# Altium PCB ESP32_USB_Dongle-PCB.PcbDoc
Units mm, origin at the board's own origin, x right, y up, seen from the top; angles counter-clockwise.
Board outline 25 x 40 mm, 4 copper layers (L1 (Sig), L2 (GND), L3 (GND), L4 (Sig)), stack 1.591 mm thick; 54 components, 44 nets, 208 pads, 160 vias.
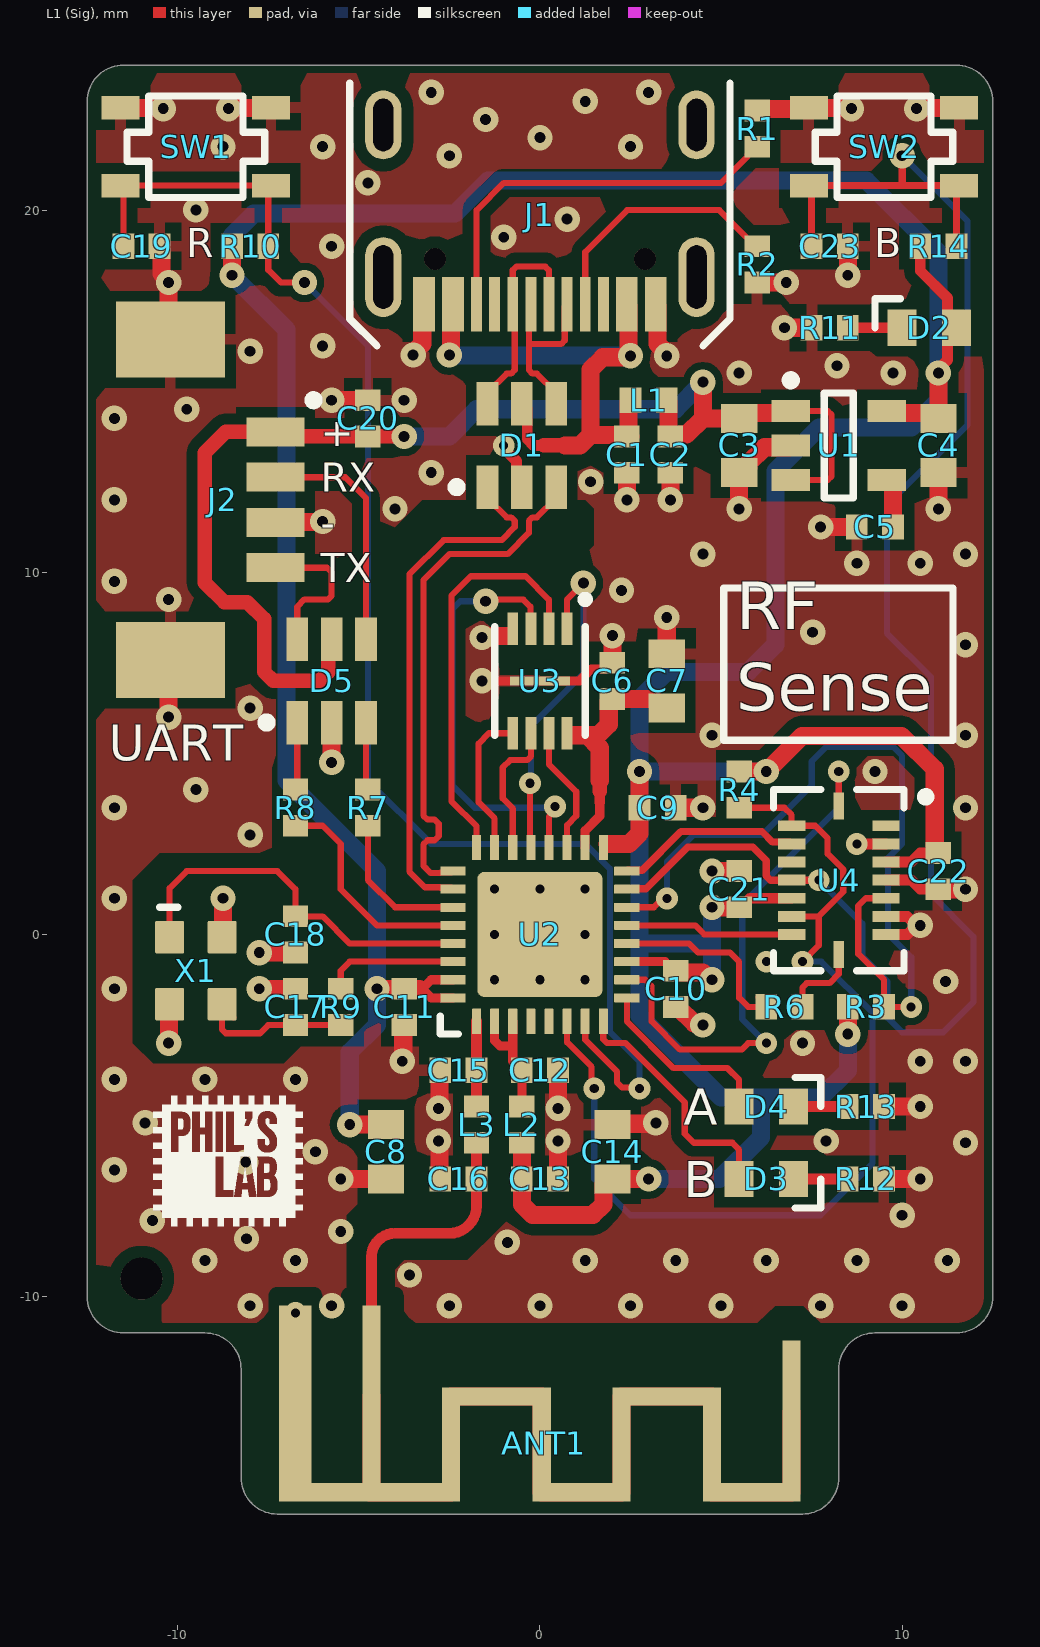
[diagram p0: L1 (Sig) view]
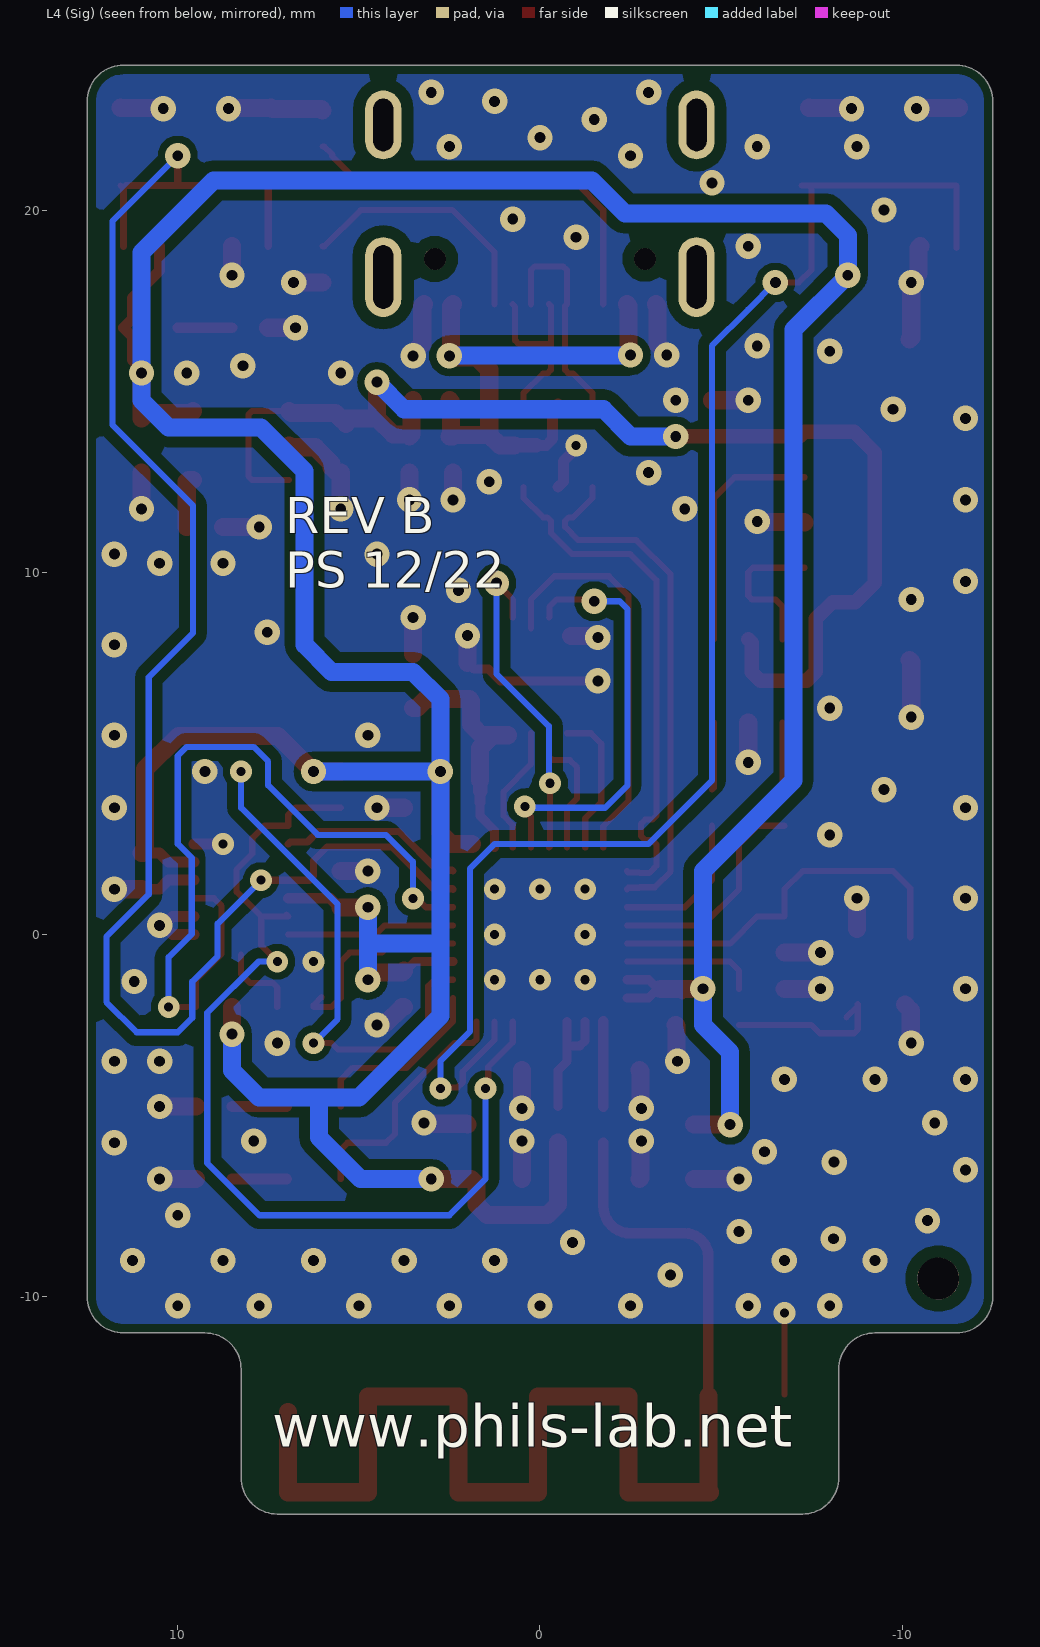
[diagram p1: L4 (Sig) view, seen from below]
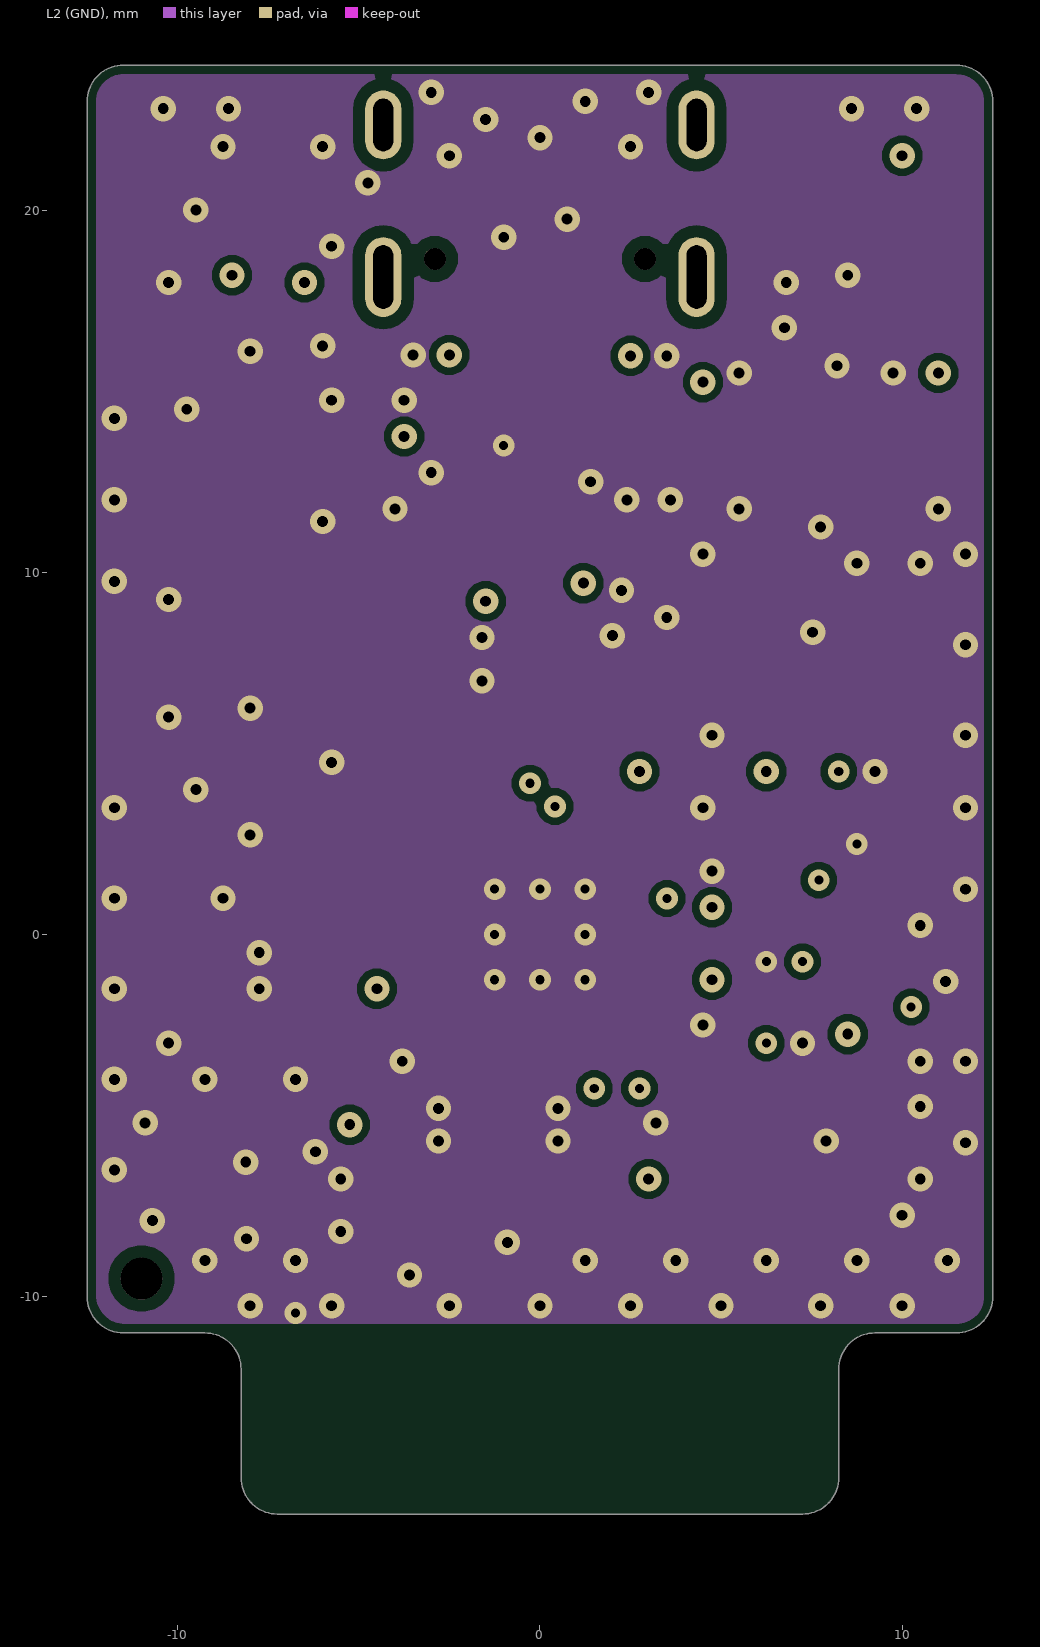
[diagram p2: L2 (GND)]
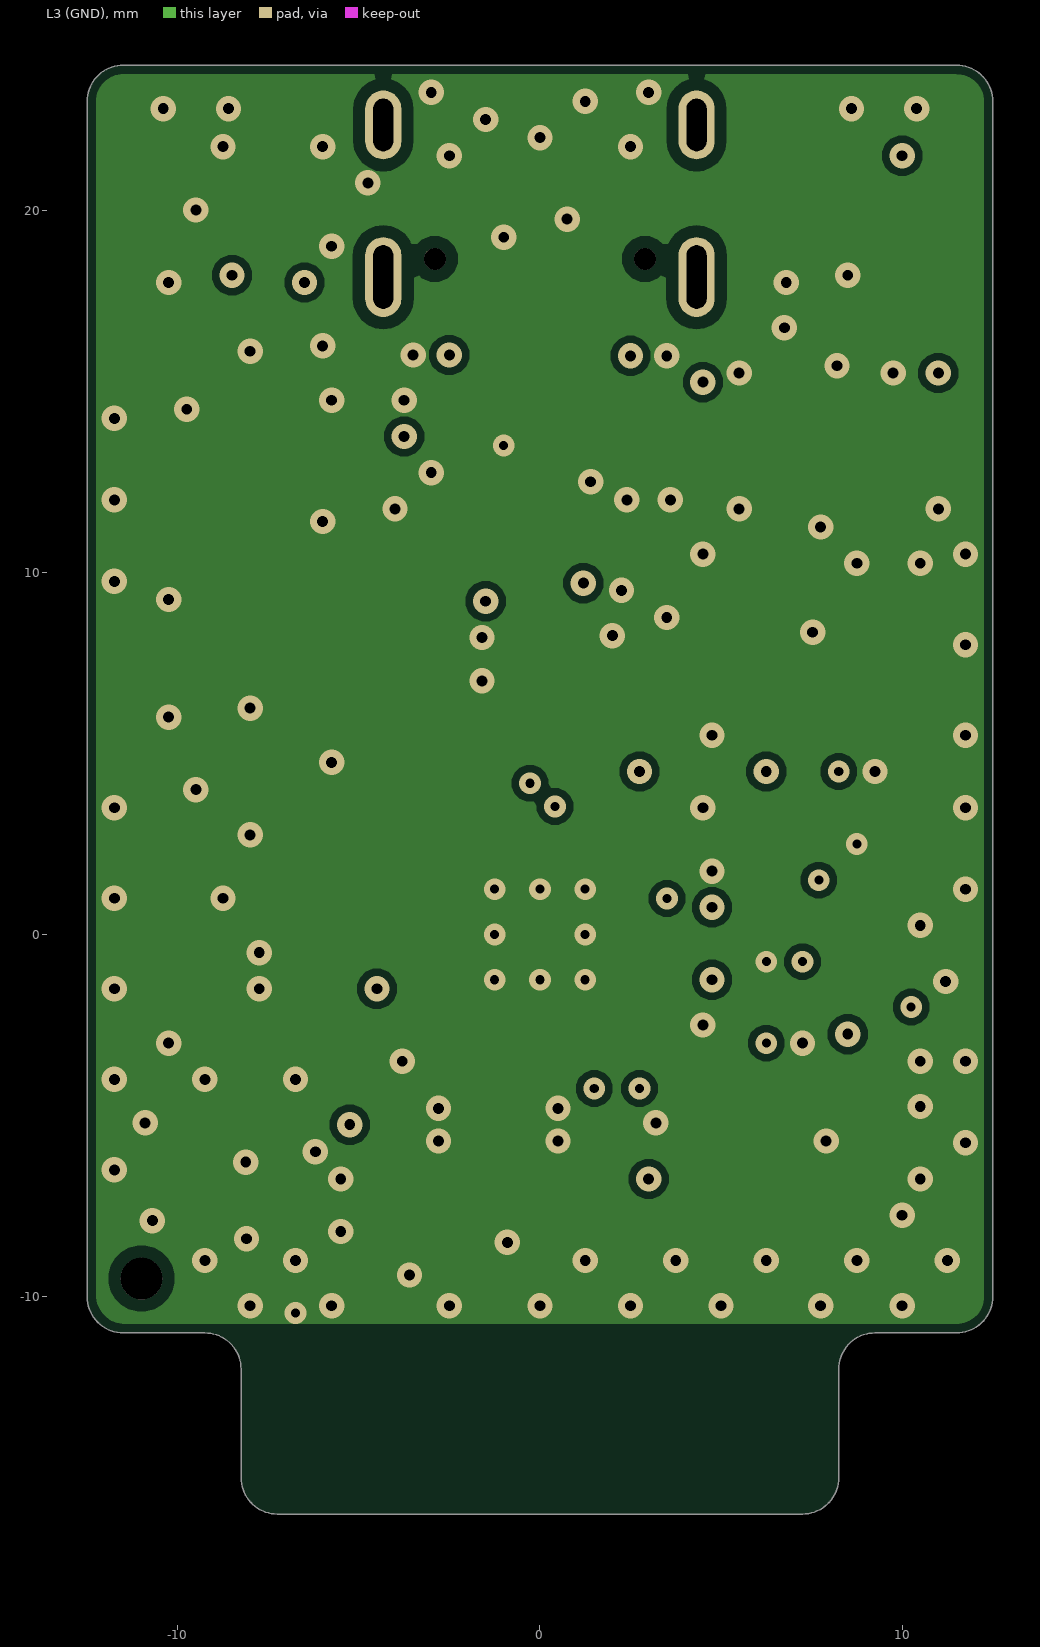
[diagram p3: L3 (GND)]
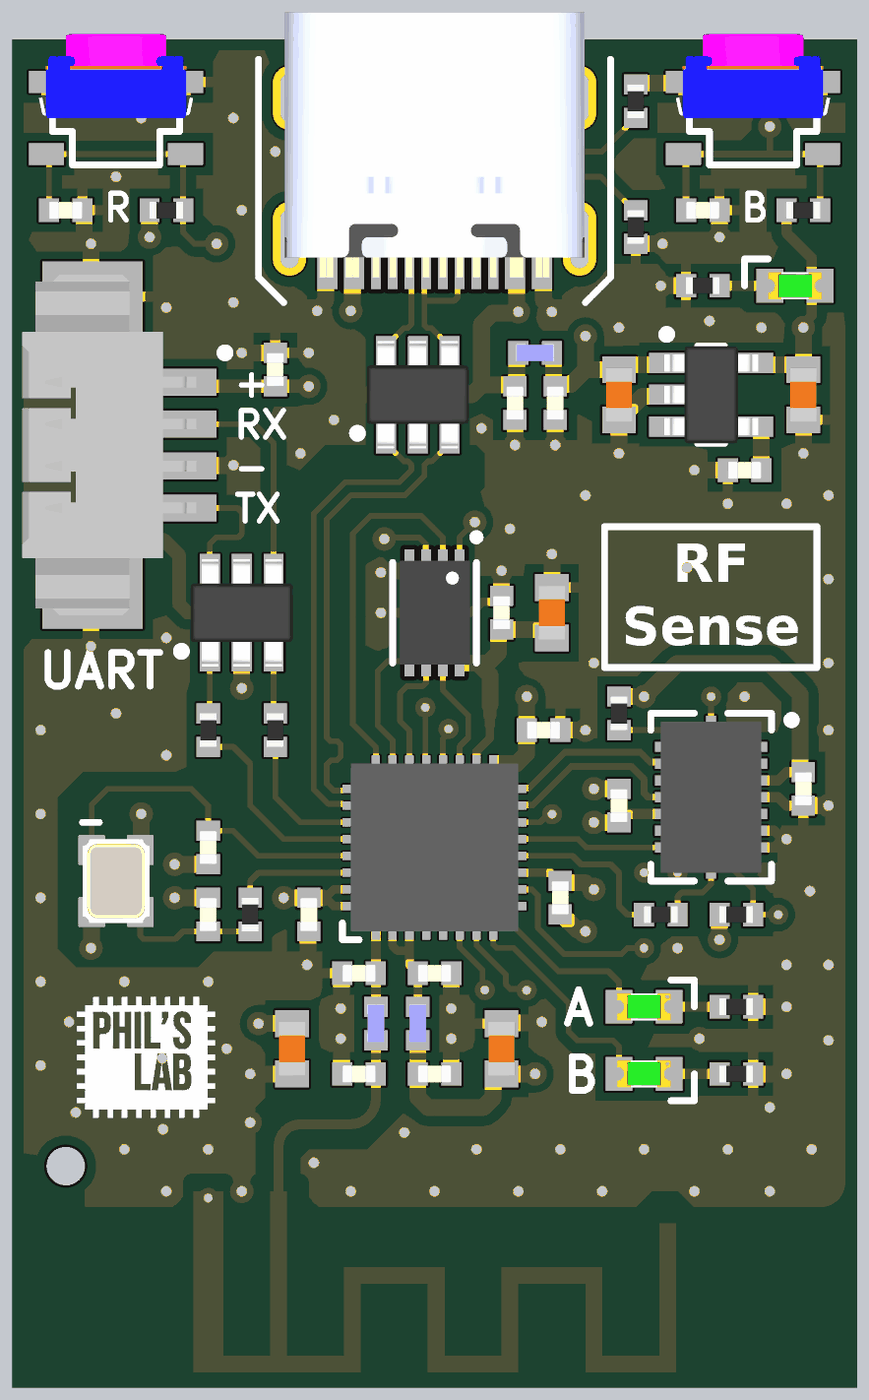
[diagram p4: 3D render of the assembled board from above, using the file's embedded part models]

## Layer stack, top to bottom
Top Solder: solder mask 0.0254, SM-001, Dk 4
L1 (Sig): signal copper 0.035
Dielectric 1: prepreg 0.2104, PP-017, Dk 4.6
L2 (GND): signal copper 0.0175
Dielectric 3: core 1.065, Core-039, Dk 4.6
L3 (GND): signal copper 0.0175
Dielectric 5: prepreg 0.2104, PP-017, Dk 4.6
L4 (Sig): signal copper 0.035
Bottom Solder: solder mask 0.0254, SM-001, Dk 4

## Board outline
-8.25,-15 -8.25,-12 ccw(c-9.25,-12) -9.25,-11 -11.5,-11 cw(c-11.5,-10) -12.5,-10 -12.5,23 cw(c-11.5,23) -11.5,24 11.5,24 cw(c11.5,23) 12.5,23 12.5,-10 cw(c11.5,-10) 11.5,-11 9.25,-11 ccw(c9.25,-12) 8.25,-12 8.25,-15 cw(c7.25,-15) 7.25,-16 -7.25,-16 cw(c-7.25,-15)

## Design rules (kind name [scope] priority, off if disabled: settings)
Clearance [All] p1: gap=0.15 ignorepadtopadclearanceinfootprint=FALSE except(0.2: Arc-Via Track-Via Via-Fill Via-Poly Via-Region; 0.254: Arc-Hole Track-Hole SMDPad-Hole THPad-Hole Via-Via Via-Hole Fill-Hole Poly-Hole Region-Hole; 0.3: Arc-Fill Arc-Poly Arc-Region Track-Fill Track-Poly Track-Region SMDPad-Fill SMDPad-Poly SMDPad-Region Fill-Fill Fill-Poly Fill-Region Poly-Poly Poly-Region Region-Region; 0.33: Arc-THPad Track-THPad THPad-Fill THPad-Poly THPad-Region)
DiffPairsRouting [All] p1: maxlimit=0.254 minlimit=0.22 mostfreqgap=0.254 toplayer_maxgap=0.22 toplayer_prefgap=0.22 toplayer_minwidth=0.17 toplayer_maxwidth=0.17 toplayer_prefwidth=0.17 bottomlayer_maxgap=0.22 bottomlayer_prefgap=0.22 bottomlayer_minwidth=0.17 bottomlayer_maxwidth=0.17 bottomlayer_prefwidth=0.17 impedanceprofiledriven=TRUE impedanceprofileid={E935A83C-F171-4141-93DF-D754979866A0} impedanceprofilevalue=90.000000 maxuncoupledlength=12.7
PolygonConnect [All] p1: thpad.connectstyle=Relief thpad.reliefconductorwidth=0.3 thpad.reliefentries=4 thpad.polygonreliefangle="90 Angle" thpad.airgapwidth=0.3 smdpad.connectstyle=Relief smdpad.reliefconductorwidth=0.3 smdpad.reliefentries=4 smdpad.polygonreliefangle="90 Angle" smdpad.airgapwidth=0.3 via.connectstyle=Direct via.reliefconductorwidth=0.254 via.reliefentries=4 via.polygonreliefangle="90 Angle" via.airgapwidth=0.254
RoutingVias [All] p1: holewidth=0.3 width=0.7 viastyle="Through Hole" minholewidth=0.3 minwidth=0.7 maxholewidth=0.4 maxwidth=0.8
SolderMaskExpansion [All] p1: expansion=0.07 istentingtop=FALSE
UnRoutedNet [All] p1: checkbadconnections=TRUE
Width [All] p1: maxlimit=1 minlimit=0.15 preferedwidth=0.2
28 further rules are at their usual default settings.

## Classes and differential pairs
differential pair class DIFF_USB: MCU_USB_D USB_D
differential pair USB_D: +USB_D_P -USB_D_N
differential pair MCU_USB_D: +MCU_USB_D_P -MCU_USB_D_N

## Components (designator, comment, footprint, x,y, rotation, side; value= is the part's Value field where it differs from the comment)
ANT1 "PCB Antenna 2.4GHz 50Ohm" ANT_IFA_USB_2_4GHZ_50R -6.75,-10.25 r0 top locked
C1 "100n" CAP_0402 2.4,13.25 r90 top
C2 "100n" CAP_0402 3.6,13.25 r90 top
C3 "10u" CAP_0603 5.5,13.5 r90 top
C4 "10u" CAP_0603 11,13.5 r90 top
C5 "100n" CAP_0402 9.25,11.25 r0 top
C6 "100n" CAP_0402 2,7 r270 top
C7 "10u" CAP_0603 3.5,7 r270 top
C8 "10u" CAP_0603 -4.25,-6 r90 top
C9 "100n" CAP_0402 3.25,3.5 r180 top
C10 "100n" CAP_0402 3.75,-1.5 r90 top
C11 "100n" CAP_0402 -3.75,-2 r90 top
C12 "100n" CAP_0402 0,-3.75 r180 top
C13 "100n" CAP_0402 0,-6.75 r180 top
C14 "10u" CAP_0603 2,-6 r270 top
C15 "3p3" CAP_0402 -2.25,-3.75 r0 top
C16 "3p3" CAP_0402 -2.25,-6.75 r0 top
C17 "10p" CAP_0402 -6.75,-2 r270 top
C18 "10p" CAP_0402 -6.75,0 r90 top
C19 "100n" CAP_0402 -11,19 r180 top
C20 "100n" CAP_0402 -4.75,14.25 r270 top
C21 "100n" CAP_0402 5.5,1.25 r270 top
C22 "100n" CAP_0402 11,1.75 r90 top
C23 "100n" CAP_0402 8,19 r180 top
D1 "USBLC6-2SC6" STM-SOT23-6L_V -0.5,13.5 r90 top
D2 "GREEN" LED_0603_GREEN 10.75,16.75 r0 top
D3 "GREEN" LED_0603_GREEN 6.25,-6.75 r180 top
D4 "GREEN" LED_0603_GREEN 6.25,-4.75 r180 top
D5 "USBLC6-2SC6" STM-SOT23-6L_V -5.75,7 r90 top
J1 "TYPE-C-31-M-12" TYPE-C-31-M-12 0,20.25 r180 top
J2 "53261-0471" MOLEX-53261-0471_V -8.75,12 r270 top
L1 "2n2" IND_0402 3,14.75 r180 top
L2 "2n2" IND_0402 -0.5,-5.25 r90 top
L3 "2n2" IND_0402 -1.75,-5.25 r90 top
R1 "5k1" RES_0402 6,22.25 r90 top
R2 "5k1" RES_0402 6,18.5 r270 top
R3 "5k1" RES_0402 9,-2 r0 top
R4 "5k1" RES_0402 5.5,4 r270 top
R6 "22R" RES_0402 6.75,-2 r180 top
R7 "470R" RES_0402 -4.75,3.5 r270 top
R8 "470R" RES_0402 -6.75,3.5 r270 top
R9 "22R" RES_0402 -5.5,-2 r270 top
R10 "5k1" RES_0402 -8,19 r180 top
R11 "1k" RES_0402 8,16.75 r0 top
R12 "1k" RES_0402 9,-6.75 r180 top
R13 "1k" RES_0402 9,-4.75 r180 top
R14 "5k1" RES_0402 11,19 r180 top
SW1 "SKRPANE010" SKRPANE010 -9.5,21.75 r0 top
SW2 "SKRPANE010" SKRPANE010 9.5,21.75 r0 top
U1 "SPX3819M5-L-3-3/TR" SOT-23-5 8.25,13.5 r0 top
U2 "ESP32-C3" QFN32-5x5 0,0 r90 top
U3 "W25Q16JVUXIQ" USON-8-2X3MM 0,7 r270 top
U4 "BMI055" BMI088 8.25,1.5 r270 top locked
X1 "40MHz" XTAL_2520 -9.5,-1 r90 top

## Footprints (in the part's own frame and the unit in brackets; to place one, negate y for a bottom-side part, rotate by r counter-clockwise, add the part's x,y. Pads: shape width x height; smd on the part's side, far side on the other; paste and mask are expansions set on the pad)
ANT_IFA_USB_2_4GHZ_50R [mm]
  rect 5x0.5 smd paste-2539.97 mask+0.102: 1(2.05,-5.15)
  rect 0.5x4.9 smd paste-2539.97 mask+0.102: 1(2.1,-2.45)
  rect 0.5x2.64 smd paste-2539.97 mask+0.102: 1(4.3,-3.58) 1(6.8,-3.58) 1(9,-3.58) 1(11.5,-3.58)
  rect 2x0.5 smd paste-2539.97 mask+0.102: 1(5.55,-2.51) 1(10.25,-2.51)
  rect 2.7x0.5 smd paste-2539.97 mask+0.102: 1(7.9,-5.15) 1(12.6,-5.15)
  rect 0.5x3.94 smd paste-2539.97 mask+0.102: 1(13.7,-2.93)
  rect 0.9x4.9 smd paste-2539.97 mask+0.102: 2(0,-2.45)
BMI088 [mm]
  rect 0.3x0.75 smd: 1(-1.5,1.3) 2(-1,1.3) 3(-0.5,1.3) 4(0,1.3) 5(0.5,1.3) 6(1,1.3) 7(1.5,1.3) 9(1.5,-1.3) 10(1,-1.3) 11(0.5,-1.3) 12(0,-1.3) 13(-0.5,-1.3) 14(-1,-1.3) 15(-1.5,-1.3)
  rect 0.75x0.3 smd: 8(2.05,0) 16(-2.05,0)
  silkscreen extent -2.5,-1.8 2.5,2.51, body extent -2.25,-1.5 2.25,1.5, height 1.01
CAP_0402 [mm]
  rect 0.6x0.7 smd: 1(-0.5,0) 2(0.5,0)
  body extent -0.5,-0.26 0.5,0.26, height 0.37
CAP_0603 [mm]
  rect 0.8x1 smd: 1(-0.75,0) 2(0.75,0)
  body extent -0.8,-0.4 0.8,0.4, height 0.51
IND_0402 [mm]
  rect 0.6x0.7 smd: 1(-0.5,0) 2(0.5,0)
  body extent -0.56,-0.26 0.56,0.26, height 0.67
LED_0603_GREEN [mm]
  rect 0.8x1 smd: A(0.75,0) K(-0.75,0)
  silkscreen extent -1.5,0 -0.8,0.8, body extent -0.8,-0.4 0.8,0.4, height 0.6
MOLEX-53261-0471_V [mm] "SMD, 4-Leads, Body 10.15x5.2mm, Pitch 1.25mm"
  rect 0.8x1.6 smd: 1(-1.875,1.45) 2(-0.625,1.45) 3(0.625,1.45) 4(1.875,1.45)
  rect 2.1x3 smd: MP1(-4.425,-1.45) MP2(4.425,-1.45)
  silkscreen extent -2.87,2.38 -2.63,2.63, body extent -5.08,-3.55 5.07,1.65, height 3.4
QFN32-5x5 [mm]
  rrect10% 0.7x0.25 smd mask+0.05: 1(-2.4,1.75) 2(-2.4,1.25) 3(-2.4,0.75) 4(-2.4,0.25) 5(-2.4,-0.25) 6(-2.4,-0.75) 7(-2.4,-1.25) 8(-2.4,-1.75) 17(2.4,-1.75) 18(2.4,-1.25) 19(2.4,-0.75) 20(2.4,-0.25) 21(2.4,0.25) 22(2.4,0.75) 23(2.4,1.25) 24(2.4,1.75)
  rrect10% 0.25x0.7 smd mask+0.05: 9(-1.75,-2.4) 10(-1.25,-2.4) 11(-0.75,-2.4) 12(-0.25,-2.4) 13(0.25,-2.4) 14(0.75,-2.4) 15(1.25,-2.4) 16(1.75,-2.4) 25(1.75,2.4) 26(1.25,2.4) 27(0.75,2.4) 28(0.25,2.4) 29(-0.25,2.4) 30(-0.75,2.4) 31(-1.25,2.4) 32(-1.75,2.4)
  rrect10% 3.45x3.45 smd mask+0.07: 33(0,0)
  silkscreen extent -2.75,2.25 -2.25,2.75, body extent -2.5,-2.5 2.5,2.5, height 0.85
RES_0402 [mm]
  rect 0.6x0.7 smd: 1(-0.5,0) 2(0.5,0)
  body extent -0.5,-0.25 0.5,0.25, height 0.3
SKRPANE010 [mm]
  rect 1.05x0.65 smd: 12(-2.075,1.075) 12(2.075,1.075) 34(-2.075,-1.075) 34(2.075,-1.075)
  silkscreen extent -1.9,-1.4 1.9,1.4, body extent -2.3,-1.6 2.3,1.6, height 2.51
SOT-23-5 [mm] "SOT23, 5-Leads, Body 2,90x2,80mm, Pitch 0,95mm, IPC Medium Density"
  rect 1.05x0.6 smd: 1(-1.325,0.95) 2(-1.325,0) 3(-1.325,-0.95) 4(1.325,-0.95) 5(1.325,0.95)
  silkscreen extent -1.45,-1.45 0.4,1.92, body extent -1.4,-1.45 1.4,1.45, height 1.45
STM-SOT23-6L_V [mm] "SOT23, 6-Leads, Body 3.05x1.75mm, Pitch 0.95mm"
  rect 1.2x0.6 smd: 1(-1.15,0.95) 2(-1.15,0) 3(-1.15,-0.95) 4(1.15,-0.95) 5(1.15,0) 6(1.15,0.95)
  silkscreen extent -1.27,1.68 -1.03,1.92, body extent -1.6,-1.53 1.6,1.53, height 1.45
TYPE-C-31-M-12 [mm]
  rect 0.6x1.5 smd mask+0.07: A1B12(-3.2,2.85) B1A12(3.2,2.85)
  rect 0.6x1.5 smd mask+0.14: A4B9(-2.4,2.85) B4A9(2.4,2.85)
  rect 0.3x1.5 smd mask+0.14: A5(-1.25,2.85) A6(-0.25,2.85) A7(0.25,2.85) A8(1.25,2.85) B5(1.75,2.85) B6(0.75,2.85) B7(-0.75,2.85) B8(-1.75,2.85)
  round 0.6 hole 0.6 unplated mask+0.3: MH(-2.9,1.6) MH(2.9,1.6)
  oval 1x1.9 hole 0.55 slot 1.45 at 90 deg mask+0.05: SH(-4.325,-2.1) SH(4.325,-2.1)
  oval 1x2.2 hole 0.55 slot 1.75 at 90 deg mask+0.05: SH(-4.325,2.1) SH(4.325,2.1)
  silkscreen extent -5.25,-3.25 5.25,4, body extent -4.47,-4.65 4.47,3.25, height 3.32
USON-8-2X3MM [mm]
  rect 0.9x0.3 smd mask+0.13: 1(-1.445,0.75) 2(-1.445,0.25) 3(-1.445,-0.25) 4(-1.445,-0.75) 5(1.445,-0.75) 6(1.445,-0.25) 7(1.445,0.25) 8(1.445,0.75)
  rect 0.25x1.65 smd paste-0.1: 9(0,0)
  silkscreen extent -2.35,-1.25 1.5,1.35, body extent -1.55,-1.05 1.55,1.05, height 0.6
XTAL_2520 [mm]
  rrect10% 0.9x0.8 smd mask+0: 1(0.925,0.725) 2(-0.925,0.725) 3(-0.925,-0.725) 4(0.925,-0.725)
  body extent -1.25,-1 1.25,1, height 0.8

## Part data
ANT1: library part ANT_IFA_USB_2_4GHZ_50R, "Inverted F 2.4GHz ISM PCB Antenna 50 Ohm", ComponentLink1Description=Datasheet, ComponentLink1URL=https://www.ti.com/lit/an/swra117d/swra117d.pdf
C1 C2 C5 C6 C9 C10 C11 C12 C13 C19 C20 C21 C22 C23: library part CAP_0402_50V, "Capacitor SMD 0402 50V", LCSC=C1525, Manufacturer=Samsung, Manufacturer Part Number=CL05B104KO5NNNC
C3 C4 C7 C8 C14: library part CAP_0603_10V, "Capacitor SMD 0603 10V", LCSC=C19702, Manufacturer=Samsung, Manufacturer Part Number=CL10A106KP8NNNC
C15 C16: library part CAP_0402_50V, "Capacitor SMD 0402 50V", LCSC=C1565, Manufacturer=FH, Manufacturer Part Number=0402CG3R3C500NT
C17 C18: library part CAP_0402_50V, "Capacitor SMD 0402 50V", LCSC=C32949, Manufacturer=Samsung, Manufacturer Part Number=CL05C100JB5NNNC
D1 D5: library part CMP-2000-05378-1, "Very low capacitance ESD protection, 3.5 pF, -40 to 125 degC, 6-Pin SOT23, RoHS, Tape and Reel", Capacitance Value=3.5pF, Clamping Voltage=17V, LCSC=C7519, Leakage Current=0.15uA, Manufacturer=STMicroelectronics, Operating Temp Range=-40Cto125C, Operating Temperature Classification=Automotive, Operating Temperature Max Deg. C=125C, Operating Temperature Min Deg. C=-40C, Package / Case=SOT-23, Package Description="6-Pin Small Outline Transistor, Body 2.925 x 1.625 mm, Pitch 0.95 mm", Package Reference=SOT23-6L, Peak Pulse Current=5A, Reverse Breakdown Voltage=6V, Reverse Stand-off Voltage=5V, Test Current (It)=1mA, Clamping Voltage (Max)=17V, Configuration=Dual, Datasheet URL=http://www.st.com/st-web-ui/static/active/en/resource/technical/document/datasheet/CD00050750.pdf, Datasheet Version="Rev. 5, 10/2011", Direction Type=Uni-Directional, Leakage Current (Max)=0.15uA, Manufacturer URL=http://www.st.com/, Mounting=SurfaceMount, Mounting Style=SurfaceMount, Number of Elements=1, Packaging=TapeandReel, Pin Count=6, Polarity=Uni-Directional, Product Depth (mm)=1.75mm, Product Height (mm)=1.3mm, Product Length (mm)=3.05mm, Rad Hardened=No, Suppressor Type=DiodeArrays, Working Voltage=5V, Working Voltage (Max)=5V
D2 D3 D4: library part LED_0402_GREEN, "LED 0402 GREEN SMD", LCSC=C434446, Manufacturer=Yongyu, Manufacturer Part Number=SZYY0402G
J1: "USB Type C Connector Horizontal SMT", LCSC=C165948, Manufacturer="Koren Hroparts", Manufacturer Part Number=TYPE-C-31-M-12
J2: library part CMP-2000-05238-1, "Male Header, Pitch 1.25 mm, 1 x 4 Position, Height 3.4 mm, -40 to 85 degC, RoHS, Tape and Reel", Current Rating=1A, LCSC=C240847, Manufacturer=Molex, Package Description="1.25mm Pitch PicoBlade(TM) Header, Surface Mount, Right Angle, Lead-Free, 4 Circuits", Voltage Rating=125V, Brand=Molex, Contact Material=PhosphorBronze, Contact Plating=Tin, Datasheet URL=http://www.molex.com/pdm_docs/sd/532610471_sd.pdf, Datasheet Version="Rev. G, 01/2012", Factory Pack Quantity=1000, Housing Material=Thermoplastic, Manufacturer URL=http://www.molex.com/, Mounting Angle=Right, Mounting Style=SMD/SMT, Number of Positions=4, Number of Positions / Contacts=4, Number of Rows=1, Packaging=Reel, Pitch=1.25mm, Product Category=Headers&WireHousings, Product Type=Headers, RoHS=Details, Series=53261, Termination Style=SMD, Tradename=PicoBlade, Type=Shrouded
L1 L2 L3: library part IND_0402, "Inductor SMD 0402", LCSC=C412264, Manufacturer=Murata, Manufacturer Part Number=LQW15AN2N2G80D
R1 R2 R3 R4 R10 R14: library part RES_0402, "Resistor SMD 0402", LCSC=C105873, Manufacturer=YAGEO, Manufacturer Part Number=RC0402JR-075K1L
R6 R9: library part RES_0402, "Resistor SMD 0402", LCSC=C25092, Manufacturer=UNI-ROYAL, Manufacturer Part Number=0402WGF220JTCE
R7 R8 R11 R12 R13: library part RES_0402, "Resistor SMD 0402", LCSC=C25117, Manufacturer=UNI-ROYAL, Manufacturer Part Number=0402WGF4700TCE
SW1 SW2: "Tactile Switch SMD SPST", LCSC=C470426, Manufacturer="Alps Alpine", Manufacturer Part Number=SKRPANE010
U1: "500mA +3.3V Low-Noise LDO Voltage Regulator", LCSC=C9055, Manufacturer=MaxLinear, Manufacturer Part Number=SPX3819M5-L-3-3/TR
U2: "Ultra­Low­Power SoC with RISC­V Single­Core CPU Supporting IEEE 802.11b/g/n (2.4 GHz Wi­Fi) and Bluetooth® 5 (LE)", LCSC=C2838500, Manufacturer=Espressif, Manufacturer Part Number=ESP32-C3
U3: "16M-BIT SERIAL FLASH MEMORY WITH / DUAL/QUAD SPI USON-8", LCSC=C2843335, Manufacturer=Winbond, Manufacturer Part Number=W25Q16JVUXIQ
U4: "Inertial Measurement Unit IMU 6-Axis LGA", LCSC=C189620, Manufacturer=Bosch, Manufacturer Part Number=BMI055
X1: library part XTAL_2520, "Crystal SMD 2520", LCSC=C255973, Manufacturer="Seiko Epson", Manufacturer Number=Q24FA20H0020900, Frequency=40MHz

## Free pads (board coordinates)
  round 1.152 hole 1.152 unplated: TH(-11,-9.5)

## Via types
v1: diameter 0.7, hole 0.3, L1 (Sig) to L4 (Sig), tented both sides, 138 vias
v2: diameter 0.6, hole 0.25, L1 (Sig) to L4 (Sig), tented both sides, 21 vias
v3: diameter 0.6/0.6/0.6/0.6 (per signal layer), hole 0.25, L1 (Sig) to L4 (Sig), tented both sides, 1 vias

## Nets (pads, with @x,y where several pads share a name; then routed paths per layer and width w, separated by ;. In a path a pad name is that pad's centre, name@x,y a point inside that pad or via, vN(x,y) a via of type N, cw(c..) or ccw(c..) an arc to the next point about the centre after c; other vN are vias at no path point)
+3V3: C4.2 C8.2 C9.2 C10.2 C11.2 C13.2 C14.2 C21.2 C22.2 D2.A L2.1 R3.1 R4.1 R10.2 R14.2 U1.5 U2.11 U2.17 U2.31 U2.32 U4.3 U4.11 | length 131.5
  L1 (Sig) w0.25: C11.2@-3.925,-1.675 C11.2 ; U2.32 -3,-1.75 -3.25,-1.5 -3,-1.25 U2.31 ; U2.11 3.45,-0.75 3.7,-1 C10.2
  L1 (Sig) w0.3: C21.2 5.55,0.75 5.8,1 U4.11 ; U4.3 10.25,2 10.5,2.25 C22.2 ; R14.2 10.5,18.322 11.25,17.572 11.25,17 D2.A 11.25,16.5 11.25,15.858 11,15.608 v1(11,15.5)
  L1 (Sig) w0.5: v1(-8.5,18.2) R10.2 ; v1(-5.25,-5.25) C8.2 ; v1(-4.5,-1.5) C11.2 -3.747,-1.503 -3.333,-1.503 ; L2.1 C13.2 -0.5,-6.846 -0.496,-6.85 -0.496,-7.457 -0.204,-7.75 1.457,-7.75 1.75,-7.457 1.75,-6.9 1.9,-6.75 C14.2 v1(3,-6.75) ; U2.17@1.874,2.5 2.457,2.5 2.75,2.793 C9.2 v1(2.75,4.5) ; C10.2 3.8,-1.05 4.496,-1.05 4.696,-1.25 v1(4.75,-1.25) ; v1(4.75,0.75) C21.2 ; R4.1 v1(6.25,4.5) 7.235,5.485 9.981,5.485 10.901,4.566 10.901,2.3 10.951,2.25 C22.2 ; v1(8.5,-2.75) R3.1 ; U1.5 9.625,14.4 10.85,14.4 C4.2 v1(11,15.5)
  L4 (Sig) w0.5: v1(-5.25,-5.25) -5.25,-3.25 -4.5,-2.5 -4.5,1.75 -7,4.25 -7,16.7 v1(-8.5,18.2) -8.5,19.3 -7.9,19.9 -2.35,19.9 -1.434,20.816 9.009,20.816 11,18.825 v1(11,15.5) 11,14.741 10.259,14 7.7,14 6.5,12.8 6.5,8 5.75,7.25 3.5,7.25 2.75,6.5 v1(2.75,4.5) ; v1(3,-6.75) 4.95,-6.75 6.1,-5.6 6.1,-4.5 ; v1(4.75,-1.25) 4.75,-0.25 ; v1(4.75,0.75) 4.75,-0.25 ; v1(6.25,4.5) v1(2.75,4.5) ; v1(8.5,-2.75) 8.5,-3.75 7.75,-4.5 6.1,-4.5 ; 2.75,-0.25 v1(2.75,4.5) ; 2.75,-0.25 2.75,-2.25 5,-4.5 6.1,-4.5 ; 2.75,-0.25 4.75,-0.25
+3V3_RF: C12.2 L2.2 U2.2 U2.3 | length 3.5
  L1 (Sig) w0.25: U2.2 -1.25,-2.929 -1.104,-3.075 -0.75,-3.075 ; U2.3 -0.75,-3.075 ; L2.2 C12.2 -0.75,-3.5 -0.75,-3.075
+VBUS: C1.2 D1.5 J1.A4B9 J1.B4A9 L1.2 | length 16
  L1 (Sig) w0.3: D1.5 -0.35,14.5 -0.35,13.676 -0.174,13.5 0.1,13.5
  L1 (Sig) w0.4: 0.1,13.5 0.7,13.5
  L1 (Sig) w0.5: v1(-2.5,16) -2.5,16.054 -2.45,16.104 -2.45,17.35 J1.B4A9 ; 0.7,13.5 1.107,13.5 1.4,13.793 ; C1.2 2.357,13.793 1.4,13.793 ; J1.A4B9 2.45,17.35 2.45,16.104 2.5,16.054 v1@2.5,16 ; C1.2@2.5,13.75 2.45,13.8 2.45,14.7 L1.2 ; v1(2.5,15.973) 2.462,15.935 1.735,15.935 1.4,15.6 1.4,13.793
  L4 (Sig) w0.5: v1(-2.5,16) -2.486,15.986 2.486,15.986 v1(2.5,15.973)
+VBUS_FILT: C2.2 C3.2 C20.2 D5.5 J2.1 L1.1 U1.1 U1.3 | length 34.7
  L1 (Sig) w0.17: U1.3 7.95,12.55 8.05,12.65 8.05,14.35 7.95,14.45 U1.1
  L1 (Sig) w0.4: D5.5 -5.85,8.05 -5.85,7.234 -6.084,7 -7.368,7 -7.618,7.25 -7.618,8.712 -8.078,9.172 -8.71,9.172 -9.25,9.712 -9.25,13.298 -8.673,13.875 J2.1 -7.175,13.75 C20.2 v1(-3.75,13.75)
  L1 (Sig) w0.5: L1.1 3.55,14.7 3.55,13.8 C2.2 ; v1(4.5,15.25) 4.5,14.25 ; C3.2@5.35,14.1 C3.2 ; U1.1 6.875,14.4 5.65,14.4 C3.2 ; C2.2 C2.2@3.65,13.8 ; C2.2 C2.2@3.65,13.8 ; C2.2@3.65,13.8 4.05,13.8 4.5,14.25 ; 4.5,14.25 C3.2
  L4 (Sig) w0.5: v1(-3.75,13.75) -2.5,13.75 -1.75,14.5 3.75,14.5 v1(4.5,15.25)
+VCC_SPI: C6.2 C7.2 U2.18 U3.8 | length 6.9
  L1 (Sig) w0.25: U2.18 1.25,2.87 1.651,3.271 1.651,3.645
  L1 (Sig) w0.3: 1.651,3.645 1.651,3.949
  L1 (Sig) w0.4: 1.651,3.949 1.651,4.249
  L1 (Sig) w0.5: U3.8@0.884,5.5 1.3,5.5 ; 1.651,4.249 1.651,5.149 1.3,5.5 ; C7.2 3.4,6.25 3.15,6.5 C6.2 1.95,6.5 1.9,6.45 1.9,5.793 1.607,5.5 1.3,5.5
ANT_RF: ANT1.1 C16.2 L3.1 | length 36.4
  L1 (Sig) w0.17: ANT1.1@-4.65,-12.75 ANT1.1@-4.65,-12.7
  L1 (Sig) w0.295: ANT1.1@-4.65,-12.7 -4.65,-8.9 cw(c-4,-8.9) -4,-8.25 -2.5,-8.25 ccw(c-2.5,-7.5) -1.75,-7.5 C16.2 L3.1
  L1 (Sig) w0.5: ANT1.1@-4.7,-15.4 ANT1.1@-4.65,-15.4 ; ANT1.1@-4.65,-12.75 ANT1.1@-4.65,-15.4 ; ANT1.1@6.95,-13.18 6.95,-15.4 5.85,-15.4 4.75,-15.4 4.75,-13.83 4.75,-12.76 3.5,-12.76 2.25,-12.76 2.25,-13.83 2.25,-15.4 1.15,-15.4 0.05,-15.4 0.05,-13.83 0.05,-12.76 -1.2,-12.76 -2.45,-12.76 -2.45,-13.83 -2.45,-15.4 ANT1.1@-4.65,-15.4
CHIP_EN: C19.2 R10.1 SW1.34 U2.7 | length 40.8
  L1 (Sig) w0.17: C19.2@-11.5,18.959 -11.5,20.675 SW1.34@-7.425,20.675 ; SW1.34@-7.225,20.675 SW1.34@-7.425,20.675 ; v1(-6.5,18) -7.15,18 -7.5,18.35 R10.1 -7.5,20.6 SW1.34@-7.425,20.675 ; U2.7@1.253,-2.403 1.253,-2.908 2.131,-3.786 2.131,-4.088 2.264,-4.221 2.715,-4.221 v2(2.747,-4.253)
  L4 (Sig) w0.17: v1(-6.5,18) -5.75,17.25 -4.75,16.25 -4.75,4.25 -3,2.5 1.25,2.5 1.931,1.819 1.931,-2.681 2.747,-3.497 v2(2.747,-4.253)
FSPI_CLK: R6.1 U4.8 | length 2.2
  L1 (Sig) w0.17: R6.1 7.25,-1.46 7.368,-1.342 7.999,-1.342 8.25,-1.091 U4.8
FSPI_D: U2.13 U4.9 | length 4.7
  L1 (Sig) w0.17: U2.13 4.287,0.25 4.537,0 U4.9
FSPI_NCS: U2.16 U4.14 | length 5.1
  L1 (Sig) w0.2: U2.16 2.425,1.775 2.824,1.775 3.891,2.842 6.129,2.842 6.421,2.55 6.9,2.55 U4.14
FSPI_NCS2: R3.2 U2.14 U4.5 | length 22.6
  L1 (Sig) w0.17: U2.14 3.147,0.75 3.39,0.993 v2(3.507,0.993) ; U4.5 9,1 8.788,0.788 8.788,-0.538 9.5,-1.25 R3.2 v2(10.25,-2)
  L4 (Sig) w0.17: v2(3.507,0.993) 3.507,2.007 4.25,2.75 6.138,2.75 7.507,4.119 7.507,4.779 7.908,5.18 9.75,5.18 10,4.93 10,2.5 9.613,2.113 9.613,0.011 10.25,-0.626 v2(10.25,-2)
FSPI_Q: R4.2 U2.6 U4.10 U4.15 | length 27.9
  L1 (Sig) w0.17: U2.6 0.75,-2.98 1.427,-3.657 1.427,-4.177 v2(1.5,-4.25) ; R4.2 6.75,3.5 6.95,3.3 U4.15 7.603,3 7.943,2.66 7.943,2.228 8.375,1.795 8.375,1.18 7.696,0.5 ; U4.10@7,0.55 U4.10 7.696,0.5 ; v2(7.25,-0.75) 7.696,-0.304 7.696,0.5
  L4 (Sig) w0.17: v2(1.5,-4.25) 1.5,-6.75 2.5,-7.75 7.743,-7.75 9.183,-6.31 9.183,-2.163 7.77,-0.75 v2(7.25,-0.75)
GND: ANT1.2 C1.1 C2.1 C3.1 C4.1 C5.1 C6.1 C7.1 C8.1 C9.1 C10.1 C11.1 C12.1 C13.1 C14.1 C15.1 C16.1 C17.1 C18.1 C19.1 C20.1 C21.1 C22.1 C23.1 D1.2 D5.2 J1.A1B12 J1.B1A12 J2.3 J2.MP1 J2.MP2 R1.2 R2.2 R11.1 R12.1 R13.1 SW1.12 SW2.12 U1.2 U2.33 U3.4 U3.9 U4.2 U4.4 U4.6 U4.7 X1.2 X1.4 | length 56.7
  L1 (Sig) w0.17: ANT1.2 ANT1.2@-6.75,-10.5
  L1 (Sig) w0.25: v1(-1.6,7) 1.089,7 1.417,7.328 1.828,7.328 C6.1
  L1 (Sig) w0.3: v2(-1,13.5) -1,13.419 -0.65,13.069 -0.65,12.5 D1.2 ; v2(8.75,2.5) U4.2 ; U4.7 10.142,0 v1@10.392,0.25 ; U4.6 10.142,0.5 v1@10.392,0.25 ; U4.4 10.25,1.5 10.5,1.25 C22.1 ; v1(10.5,0.25) v1@10.392,0.25
  L1 (Sig) w0.5: SW1.12@-11.575,22.825 -11.562,22.812 -10.412,22.812 v1(-10.4,22.8) ; C19.1 -10.45,18.95 -10.45,18.254 -10.25,18.054 v1(-10.25,18) -10.25,16.475 J2.MP1 ; v1(-10.25,-3) -10.237,-2.987 -10.237,-2.1 X1.2@-10.075,-1.937 ; v1(-10.25,6) -10.25,7.525 J2.MP2 ; X1.4@-8.75,0.15 v1(-8.75,1) ; v1(-8.6,22.8) -8.588,22.812 -7.437,22.812 SW1.12@-7.425,22.825 ; v1(-7.75,-1.5) C17.1 ; v1(-7.75,-0.5) C18.1 ; J2.3 -7.287,11.387 -6.013,11.387 v1(-6,11.4) ; v1(-5.75,4.75) D5.2 ; v1(-5.75,14.75) C20.1 ; v1(-5.5,-6.75) C8.1 ; v1(-3.8,-3.5) -3.775,-3.475 -3.775,-2.525 C11.1 ; v1(-3.5,16) -3.5,16.054 -3.25,16.304 -3.25,17.35 J1.B1A12 ; v1(-2.8,-5.7) -2.775,-5.725 -2.775,-6.725 C16.1 ; v1(-2.8,-4.8) -2.775,-4.775 -2.775,-3.775 C15.1 ; v1(-1.6,8.2) -1.562,8.238 -1.42,8.238 -1.417,8.242 U3.4@-0.855,8.242 ; C13.1 v1(0.5,-5.7) ; v1(0.5,-4.8) C12.1 ; C14.1 2.025,-5.225 3.175,-5.225 v1(3.2,-5.2) ; C6.1 v1(2,8.25) ; v1(2.4,12) C1.1 ; J1.A1B12 3.25,17.35 3.25,16.304 3.5,16.054 v1@3.5,16 ; C7.1 v1(3.5,8.75) ; v1(3.6,12) C2.1 ; C10.1 3.8,-2 4.262,-2.462 4.462,-2.462 v1(4.5,-2.5) ; C9.1 v1(4.5,3.5) ; v1(4.75,1.75) C21.1 ; v1(5.5,11.75) C3.1 5.6,12.75 5.75,12.9 5.75,13 6.2,13.45 6.875,13.45 U1.2 ; R2.2 v1(6.8,18) ; R1.2 6.037,22.788 7.388,22.788 7.425,22.825 7.438,22.812 8.588,22.812 v1(8.6,22.8) ; v1(6.75,16.75) R11.1 ; v1(7.75,11.25) C5.1 ; v1(8.5,18.2) C23.1 ; R12.1 v1(10.5,-6.75) ; R13.1 v1(10.5,-4.75) ; v1(10.4,22.8) 10.412,22.812 11.563,22.812 SW2.12@11.575,22.825 ; C22.1 v1(11.75,1.25) ; v1(11,11.75) C4.1
  other v1: -8,-10.25 -5.75,-10.25 -2.5,-10.25 0,-10.25 2.5,-10.25 5,-10.25 7.75,-10.25 10,-10.25 -3.6,-9.4 -9.25,-9 -6.75,-9 1.25,-9 3.75,-9 6.25,-9 8.75,-9 11.25,-9 -0.9,-8.5 -8.1,-8.4 -5.5,-8.2 -10.7,-7.9 10,-7.75 -11.75,-6.5 -8.123,-6.286 -6.2,-6 11.75,-5.75 7.9,-5.7 -10.9,-5.2 -11.75,-4 -9.25,-4 -6.75,-4 10.5,-3.5 11.75,-3.5 7.25,-3 -11.75,-1.5 11.2,-1.3 -11.75,1 -8,2.75 -11.75,3.5 11.75,3.5 -9.5,4 9.25,4.5 4.75,5.5 11.75,5.5 -8,6.25 11.75,8 7.529,8.345 -10.25,9.25 2.25,9.5 -11.75,9.75 8.75,10.25 10.5,10.25 4.5,10.5 11.75,10.5 -4,11.75 -11.75,12 1.4,12.5 -3,12.75 -11.75,14.25 -9.75,14.5 -3.75,14.75 5.5,15.5 9.75,15.5 8.2,15.7 3.5,15.973 -8,16.1 -6,16.25 -5.75,19 -1,19.25 0.75,19.75 -9.5,20 -4.75,20.75 -2.5,21.5 -8.75,21.75 -6,21.75 2.5,21.75 0,22 -1.5,22.5 1.25,23 -3,23.25 3,23.25
  other v2: -1.25,-1.25 0,-1.25 1.25,-1.25 6.25,-0.75 -1.25,0 1.25,0 -1.25,1.25 0,1.25 1.25,1.25
  other v3: -6.75,-10.45
INT_ACC: U2.10 U4.16 | length 15.1
  L1 (Sig) w0.17: U2.10 2.906,-1.25 3.083,-1.427 3.083,-2.397 3.863,-3.178 5.572,-3.178 5.75,-3 v2(6.25,-3) ; U4.16 v2(8.25,4.5)
  L4 (Sig) w0.17: v2(6.25,-3) 5.586,-2.336 5.586,0.836 8.25,3.5 v2(8.25,4.5)
INT_GYR_GPIO9: C23.2 R14.1 SW2.34 U2.15 U4.12 | length 48.2
  L1 (Sig) w0.17: SW2.34@11.5,20.6 SW2.34@11.575,20.675
  L1 (Sig) w0.2: U2.15 2.415,1.265 2.929,1.265 4.08,2.415 5.878,2.415 6.25,2.044 6.25,1.617 6.367,1.5 U4.12 v2(7.7,1.5) ; C23.2 7.5,20.6 7.425,20.675 10,20.675 ; v1(10,21.5) 10,20.675 ; R14.1 11.5,20.6 11.425,20.675 10,20.675
  L4 (Sig) w0.17: v2(7.7,1.5) 8.9,0.3 8.9,-0.6 9.6,-1.3 9.6,-2.302 9.998,-2.7 11.136,-2.7 11.967,-1.869 11.967,-0.063 10.8,1.104 10.8,7.1 9.579,8.321 9.579,11.844 11.8,14.065 11.8,19.7 v1(10,21.5)
LDO_BYP: C5.2 U1.4 | length 1.4
  L1 (Sig) w0.5: U1.4 9.7,12.55 9.75,12.5 C5.2
LED_3V3_K: D2.K R11.2 | length 1.5
  L1 (Sig) w0.3: R11.2 D2.K
LED_A: D3.A U2.8 | length 6.8
  L1 (Sig) w0.17: U2.8 1.75,-2.893 1.85,-2.992 2.354,-2.992 4,-4.639 4,-5.5 4.25,-5.75 5.312,-5.75 5.5,-5.938 D3.A
LED_A_K: D3.K R12.2 | length 1.5
  L1 (Sig) w0.3: D3.K R12.2
LED_B: D4.A U2.9 | length 5.2
  L1 (Sig) w0.17: U2.9 2.4,-2.4 3.686,-3.686 5.177,-3.686 5.5,-4.01 D4.A
LED_B_K: D4.K R13.2 | length 1.5
  L1 (Sig) w0.3: D4.K R13.2
LNA_IN: C15.2 L3.2 U2.1 | length 2.3
  L1 (Sig) w0.295: L3.2 C15.2 U2.1
MCU_FSPICLK: R6.2 U2.12 | length 5.5
  L1 (Sig) w0.17: U2.12 4.118,-0.25 4.368,-0.5 5.25,-0.5 5.5,-0.75 5.5,-1.75 5.75,-2 R6.2 6.25,-1.95 R6.2@6.035,-1.735
MCU_UART0_RX: R7.2 U2.27 | length 4.2
  L1 (Sig) w0.17: R7.2 -4.75,1.5 -4,0.75 U2.27
MCU_UART0_TX: R8.2 U2.28 | length 6.2
  L1 (Sig) w0.17: R8.2 -6,3 -5.5,2.5 -5.5,1.25 -4.5,0.25 U2.28
MCU_USB_D_N: D1.3 U2.25 | length 14.5
  L1 (Sig) w0.17: U2.25 -2.44,1.71 -2.745,1.71 -2.76,1.695 -3.014,1.695 -3.15,1.831 -3.215,1.897 -3.215,2.486 -3.101,2.6 -2.908,2.6 -2.794,2.714 -2.794,3.056 -2.908,3.17 -3.101,3.17 -3.215,3.284 -3.215,3.431 -3.215,9.785 -2.5,10.5 -0.893,10.5 -0.305,11.088 -0.305,11.415 -0.205,11.515 -0.085,11.515 0.45,12.05 D1.3
MCU_USB_D_P: D1.1 U2.26 | length 14.6
  L1 (Sig) w0.17: U2.26 -2.44,1.29 -2.745,1.29 -2.76,1.305 -3.175,1.305 -3.605,1.735 -3.605,9.946 -2.662,10.89 -1.055,10.89 -0.695,11.25 -0.695,11.415 -0.795,11.515 -0.915,11.515 -1.45,12.05 D1.1
NetD5_4: D5.4 J2.2 | length 6.6
  L1 (Sig) w0.17: J2.2 -5.375,12.625 -4.8,12.05 D5.4
NetD5_6: D5.6 J2.4 | length 4.2
  L1 (Sig) w0.17: J2.4 -5.875,10.125 -5.75,10 -5.75,9.35 -5.85,9.25 -6.5,9.25 -6.7,9.05 D5.6
NetJ1_A5: J1.A5 R2.1 | length 7.1
  L1 (Sig) w0.17: J1.A5 1.25,18.838 2.412,20 4.95,20 5.95,19 R2.1
NetJ1_B5: J1.B5 R1.1 | length 11.1
  L1 (Sig) w0.17: J1.B5 -1.75,20 -1,20.75 5,20.75 5.735,21.485 5.735,21.535 5.95,21.75 R1.1
SPI_CLK: U2.22 U3.6 | length 3.9
  L1 (Sig) w0.17: U2.22 -0.75,3.482 -1.025,3.758 -1.025,4.611 -0.824,4.812 -0.35,4.812 -0.25,4.912 U3.6
SPI_DI: U2.23 U3.5 | length 4.1
  L1 (Sig) w0.17: U2.23 -1.25,3.204 -1.694,3.648 -1.694,5.269 -1.408,5.555 U3.5
SPI_DO: U2.24 U3.2 | length 11.2
  L1 (Sig) w0.17: U2.24 -1.75,2.988 -2.442,3.679 -2.442,9.355 -1.906,9.891 -0.395,9.891 0.25,9.246 U3.2
SPI_NCS: U2.21 U3.1 | length 9.1
  L1 (Sig) w0.17: v2(-0.275,4.175) -0.275,2.425 U2.21 ; U3.1@0.75,8.75 0.75,9.25 v1(1.2,9.7)
  L4 (Sig) w0.17: v2(-0.275,4.175) -0.25,4.2 -0.25,5.75 1.2,7.2 v1(1.2,9.7)
SPI_NHLD: U2.19 U3.7 | length 3.6
  L1 (Sig) w0.17: U3.7 0.25,4.697 1.003,3.944 1.003,3.272 0.75,3.019 U2.19
SPI_NWP: U2.20 U3.3 | length 11.8
  L1 (Sig) w0.17: v1(-1.5,9.2) -1.455,9.245 -0.456,9.245 -0.261,9.05 -0.261,8.761 U3.3@-0.25,8.75 ; U2.20 0.25,3.25 0.418,3.418 v2(0.418,3.534)
  L4 (Sig) w0.17: v1(-1.5,9.2) -2.2,9.2 -2.42,8.98 -2.42,4.12 -1.8,3.5 0.383,3.5 v2(0.418,3.534)
UART0_RX: D5.3 R7.1 | length 1.9
  L1 (Sig) w0.17: D5.3 -4.8,4.05 R7.1
UART0_TX: D5.1 R8.1 | length 1.9
  L1 (Sig) w0.17: R8.1 -6.7,4.05 D5.1
USB_D_N: D1.4 J1.A7 J1.B7 | length 5.2
  L1 (Sig) w0.17: J1.A7 -0.305,17.345 -0.305,16.3 ; D1.4 0.45,14.95 -0.085,15.485 -0.205,15.485 -0.305,15.585 -0.305,16.3 ; J1.B7 0.685,17.335 0.685,16.4 0.585,16.3 -0.305,16.3
USB_D_P: D1.6 J1.A6 J1.B6 | length 6.1
  L1 (Sig) w0.17: D1.6 -1.45,14.95 -0.915,15.485 -0.795,15.485 -0.695,15.585 -0.695,17.345 J1.B6 -0.75,18.341 -0.65,18.441 0.15,18.441 0.25,18.341 J1.A6
XTAL_IN: C17.2 R9.2 X1.3 | length 4.6
  L1 (Sig) w0.17: X1.3 X1.3@-8.775,-1.975 ; X1.3@-8.46,-2.29 X1.3@-8.775,-1.975 ; R9.2 C17.2 -7.5,-2.5 -7.725,-2.725 -8.675,-2.725 -8.775,-2.625 X1.3@-8.775,-1.975
XTAL_N: C18.2 U2.29 X1.1 | length 10.6
  L1 (Sig) w0.17: X1.1 -10.225,1.275 -9.75,1.75 -7.25,1.75 -6.75,1.25 C18.2 -6,0.5 -5.25,-0.25 U2.29
XTAL_P: R9.1 U2.30 | length 3.7
  L1 (Sig) w0.17: R9.1 -5.5,-1 -5.25,-0.75 U2.30
pads on no net: J1.A8 J1.B8 J1.MH J1.SH U2.4 U2.5 U4.1 U4.13

## Polygon pours and split planes (outlines as drawn)
GND on L1 (Sig) "GND_L1" (solid, pour order 2): 7.75,-10.725 7.275,-10.25 6.5,-10.25 6,-10.725 -3.5,-10.725 cw(c-3.5,-10.475) -3.75,-10.475 -3.75,-9.975 ccw(c-4,-9.975) -4,-9.725 -5.25,-9.725 ccw(c-5.25,-9.975) -5.5,-9.975 -5.5,-10.475 cw(c-5.75,-10.475) -5.75,-10.725 cw(c-5.75,-10.475) -6,-10.475 -6,-9.975 ccw(c-6.25,-9.975) -6.25,-9.725 -7.25,-9.725 ccw(c-7.25,-9.975) -7.5,-9.975 -7.5,-10.475 cw(c-7.75,-10.475) -7.75,-10.725 -11.5,-10.725 cw(c-11.5,-9.975) -12.25,-9.975 -12.25,-6.225 -12.25,-2.475 -12.25,23.025 cw(c-11.5,23.025) -11.5,23.775 11.5,23.775 cw(c11.5,23.025) 12.25,23.025 12.25,-1.975 12.25,-6.225 12.25,-9.975 cw(c11.5,-9.975) 11.5,-10.725
GND on L4 (Sig) "GND_L4" (solid, pour order 4): -12.25,-9.95 ccw(c-11.45,-9.95) -11.45,-10.75 11.5,-10.75 ccw(c11.5,-10) 12.25,-10 12.25,23 ccw(c11.5,23) 11.5,23.75 -11.5,23.75 ccw(c-11.5,23) -12.25,23
GND on L2 (GND) "GND_L2" (solid, pour order 0): -12.25,-9.95 ccw(c-11.45,-9.95) -11.45,-10.75 11.5,-10.75 ccw(c11.5,-10) 12.25,-10 12.25,23 ccw(c11.5,23) 11.5,23.75 -11.5,23.75 ccw(c-11.5,23) -12.25,23
GND on L3 (GND) "GND_L3" (solid, pour order 3): -12.25,-9.95 ccw(c-11.45,-9.95) -11.45,-10.75 11.5,-10.75 ccw(c11.5,-10) 12.25,-10 12.25,23 ccw(c11.5,23) 11.5,23.75 -11.5,23.75 ccw(c-11.5,23) -12.25,23

## Other copper
L1 (Sig):
  pour cut-out: -5.347,-10.75 -4,-10.75 -4,-9.25 -3.75,-9 -2,-9 -0.925,-7.925 -0.925,-7.25 -4.85,-7.25 -5.347,-7.747
  pour cut-out: -11.25,1.5 -10.5,2.25 -7.25,2.25 -6.5,1.5 -6.5,-3 -7.073,-3.573 -10.677,-3.573 -11.25,-3
  pour cut-out: -4.25,11 -3.25,12 1.25,12 1.5,11.75 1.5,10.75 0.544,9.794 -1.956,9.794 -2.75,9 -2.75,1.73 -3.175,1.305 -3.805,1.305 -4.25,1.75 -4.25,3.5

## Silkscreen, mask and mechanical layers (free items; w line width, h text height)
Top Overlay:
  drawing of 10 lines, arcs and shapes, not listed
  text "R" at -9.767,18.7 h0.8
  text "B" at 9.233,18.7 h0.8
  text "+" at -6.05,13.475 h0.8
  text "RX" at -6.05,12.225 h0.8
  text "-" at -6.05,10.975 h0.8
  text "TX" at -6.05,9.725 h0.8
  text "RF / Sense" at 5.421,5.75 h2.25
  text "UART" at -11.9,4.8 h1
  text "A" at 3.967,-5.25 h1
  text "B" at 3.967,-7.25 h1
Bottom Overlay:
  text "REV B / PS 12/22" at 7.032,9.57 h1
  text "www.phils-lab.net" at 7.384,-14.529 h2
Board Shape:
  lines w0.2: 11.5,-11 ccw(c11.5,-11) 11.5,-11 ; 11.5,-11 ccw(c11.5,-10) 12.5,-10 12.5,23 ccw(c11.5,23) 11.5,24 -11.5,24 ccw(c-11.5,23) -12.5,23 -12.5,-10 ccw(c-11.5,-10) -11.5,-11 -9.25,-11 cw(c-9.25,-12) -8.25,-12 -8.25,-15 ccw(c-7.25,-15) -7.25,-16 7.25,-16 ccw(c7.25,-15) 8.25,-15 8.25,-12 cw(c9.25,-12) 9.25,-11 11.5,-11 ; 11.5,-11 11.5,-11

## Text inside footprints (layer, text, board x,y; h text height)
D2: Mechanical 13 "+" at 12.067,17.358 h0.5
D3: Mechanical 13 "+" at 4.933,-7.358 h0.5 r180
D4: Mechanical 13 "+" at 4.933,-5.358 h0.5 r180